# EAGLE board ATTiny85 5LED R1 (EAGLE 8.3.2)
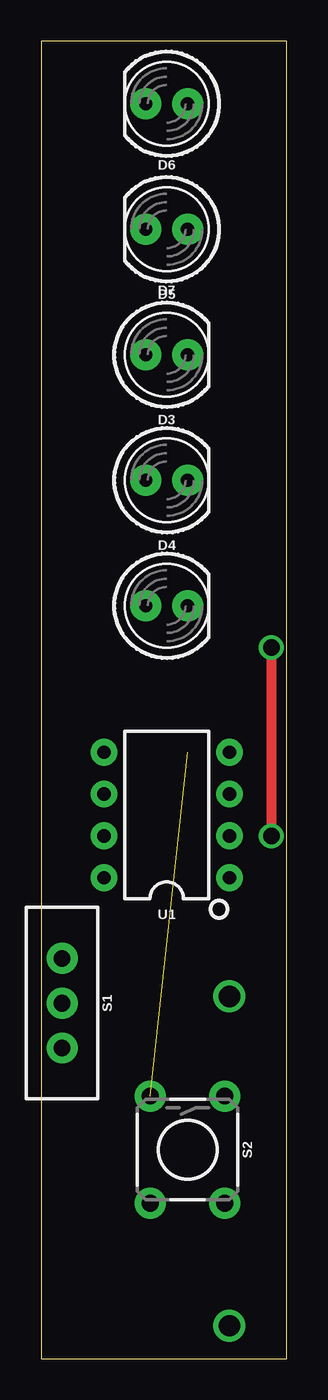
[diagram p0: board, top side]
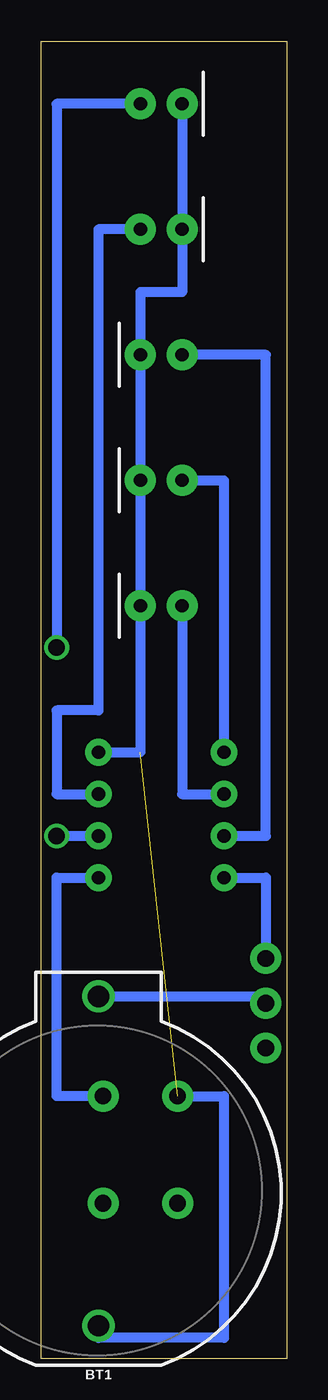
[diagram p1: board, bottom side, seen from below]

Size 14.91 x 80 mm. Coordinates in mm from the lower left corner, seen from the top.
Outline: 0,0 14.91,0 14.91,80 0,80 0,0
Copper layers (1*16): Top 0.035mm / dielectric 1.5mm / Bottom 0.035mm
Design rules "default": minimum track width 6mil, minimum drill 0.35mm, track to track 6mil, track to pad 6mil, pad to pad 6mil, via to via 6mil, smd to smd 6mil, copper to edge 40mil, drill to drill 6mil, minimum pad ring 10mil, minimum via ring 8mil, stop-mask expansion 4mil, vias tented up to drill 0mil, thermal gap 10mil

## Footprints (pad centres in the part's own frame; a part is rotated, then mirrored left to right if it is on the bottom)
BATTCOM_20MM_PTH = drill 1.3: 1 11.85,0; 2 -8.15,0
LED_5MM = drill 0.813 pad 1.88: A -1.27,0; K 1.27,0
SWITCH_SPDT_PTH_11.6X4.0MM_KIT = drill 1.016 pad 1.88: 1 0,2.718; 2 0,0; 3 0,-2.718
TACTILE_SWITCH_PTH_6.0MM = drill 1.016 pad 1.88: 1 -3.251,2.261; 2 3.251,2.261; 3 -3.251,-2.261; 4 3.251,-2.261
DIP08_MCU = drill 0.813 pad 1.626: 1 -3.81,-3.81; 2 -1.27,-3.81; 3 1.27,-3.81; 4 3.81,-3.81; 5 3.81,3.81; 6 1.27,3.81; 7 -1.27,3.81; 8 -3.81,3.81

## Placement (x,y rotation side)
BT1  [BATTCOM_20MM_PTH]  11.43,10.16 90 bottom
D3  [LED_5MM]  7.62,53.34 0 top
D4  [LED_5MM]  7.62,45.72 0 top
D5  [LED_5MM]  7.62,60.96 0 top
D6  [LED_5MM]  7.62,76.2 180 top
D7  [LED_5MM]  7.62,68.58 180 top
S1  [SWITCH_SPDT_PTH_11.6X4.0MM_KIT]  1.27,21.59 180 top
S2  [TACTILE_SWITCH_PTH_6.0MM]  8.89,12.7 270 top
U1  TINY85-20-DIP  [DIP08_MCU]  7.62,33.02 90 top

## Library data of the parts
BT1 = SparkFun-Batteries; PROD_ID: BATT-09031; SF_SKU: PRT-00783
D3-D7 = SparkFun-LED
S1 = SparkFun-Switches; PROD_ID: SWCH-08261; SF_SKU: COM-00102
S2 = SparkFun-Switches; PROD_ID: SWCH-08441; SF_SKU: COM-00097
U1 = SparkFun-Retired; PROD_ID: IC-09445

## Nets
GND: BT1.2 D3.K D4.K D5.K D6.K D7.K S2.3 U1.4
N$1: BT1.1 S1.2
PB0: D3.A U1.5
PB1: D4.A U1.6
PB2: D5.A U1.7
PB3: D6.A U1.2
PB4: D7.A U1.3
PB5: S2.1 U1.1
VCC: S1.3 U1.8

## Tracks (layer width: path | path; a pad name or v marks a point on that pad's centre or on a via)
GND  (1 unrouted)
  Bottom 0.61: U1.4 8.89,36.83 D4.K D3.K D5.K 8.89,64.77 6.35,64.77 D7.K D6.K | S2.3 3.81,15.95 3.81,1.27 11.43,1.27 BT1.2
N$1
  Bottom 0.61: BT1.1 1.27,22.01 S1.2
PB0
  Bottom 0.61: D3.A 3.81,53.34 U1.5
PB1
  Bottom 0.61: D4.A 6.35,34.29 U1.6
PB2
  Bottom 0.61: U1.7 1.27,31.75 1.27,60.96 D5.A
PB3  (via drill 1)
  Top 0.61: v13.97,43.18 v13.97,31.75
  Bottom 0.61: D6.A 13.97,76.2 v13.97,43.18 | v13.97,31.75 U1.2
PB4
  Bottom 0.61: D7.A 11.43,68.58 11.43,39.37 13.97,39.37 13.97,34.29 U1.3
PB5
  Bottom 0.61: S2.1 13.97,15.95 13.97,29.21 U1.1
VCC
  Bottom 0.61: U1.8 1.27,29.21 S1.3